# Altium PCB PCB_SHT30.PcbDoc
Units mm, origin at the board's own origin, x right, y up, seen from the top; angles counter-clockwise.
Board outline 12.19 x 17.09 mm, 2 copper layers (Top Layer, Bottom Layer); 8 components, 8 nets, 27 pads, 0 vias.
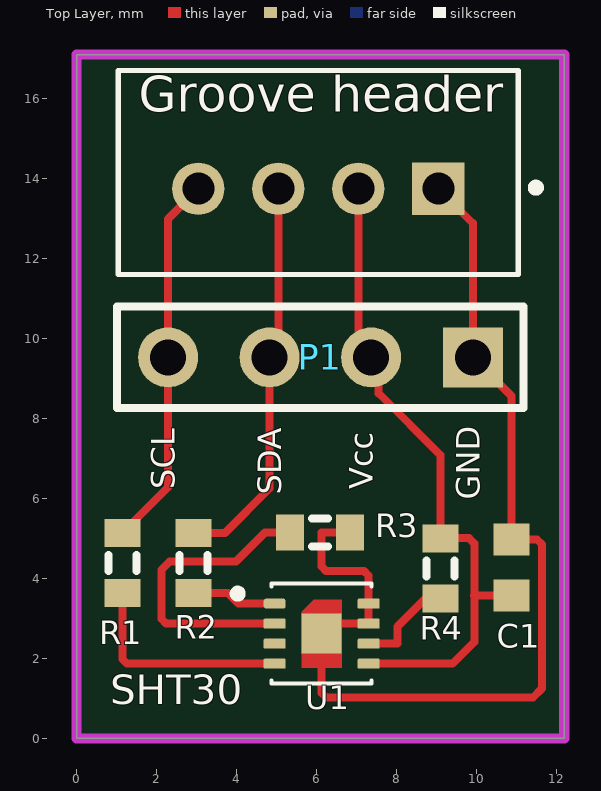
[diagram p0: Top Layer view]
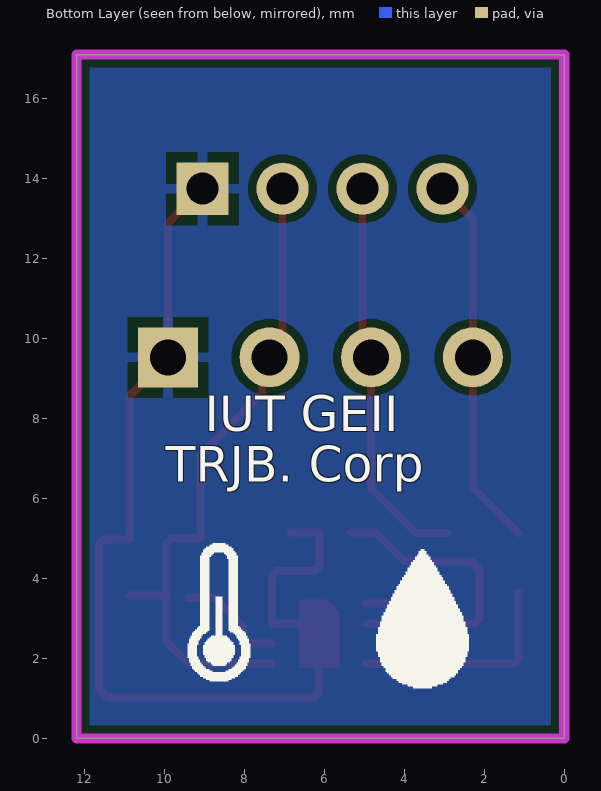
[diagram p1: Bottom Layer view, seen from below]

## Layer stack, top to bottom
Top Solder: solder mask 0.0102, Solder Resist, Dk 3.5
Top Layer: signal copper 0.0356
Dielectric 1: dielectric 0.32, FR-4, Dk 4.8
Bottom Layer: signal copper 0.0356
Bottom Solder: solder mask 0.0102, Solder Resist, Dk 3.5

## Board outline
0,0 0,17.094 12.192,17.094 12.192,0

## Design rules (kind name [scope] priority, off if disabled: settings)
Clearance [All] p1: gap=0.2 ignorepadtopadclearanceinfootprint=FALSE
PolygonConnect [All] p1: connectstyle=Relief reliefconductorwidth=0.254 reliefentries=4 polygonreliefangle="90 Angle" airgapwidth=0.254
RoutingVias [All] p1: holewidth=0.711 width=1.27 viastyle="Through Hole" minholewidth=0.711 minwidth=1.27 maxholewidth=0.711 maxwidth=1.27
SolderMaskExpansion [All] p1: expansion=0.102 istentingtop=FALSE
SupplyNets "Schematic Supply Nets_1" [InNet('GND')] p1: voltage=0.000
SupplyNets "Schematic Supply Nets" [InNet('VCC')] p2: voltage=0.000
Width [All] p1: maxlimit=0.254 minlimit=0.2 preferedwidth=0.2 minimp=50.000000 maximp=50.000000 favimp=50.000000
30 further rules are at their usual default settings.

## Components (designator, comment, footprint, x,y, rotation, side; value= is the part's Value field where it differs from the comment)
C1 "Cap Semi" 1608[0603] 10.871,4.267 r270 top value=100nF
"Groove header" "Groove Sensor Header" SEEED_110990030 6.042,13.741 r180 top (schematic designator P2)
P1 "Header 4" HDR1X4 9.906,9.525 r180 top
R1 "Res3" J1-0603 1.143,4.383 r90 top value=10k
R2 "Res3" J1-0603 2.921,4.383 r90 top value=10k
R3 "Res3" J1-0603 6.084,5.145 r0 top value=10k
R4 "Res3" J1-0603 9.093,4.242 r90 top value=10k
U1 "SHT30" XDCR_SHT30-DIS-B10KS 6.128,2.617 r0 top

## Footprints (in the part's own frame and the unit in brackets; to place one, negate y for a bottom-side part, rotate by r counter-clockwise, add the part's x,y. Pads: shape width x height; smd on the part's side, far side on the other; paste and mask are expansions set on the pad)
1608[0603] [mm] "Chip Capacitor, Body 1.6x0.8mm, IPC High Density"
  rect 0.8x0.9 smd: 1(-0.7,0) 2(0.7,0)
  body extent -0.87,-0.48 0.87,0.48, height 1.3
HDR1X4 [mm] "Connector; Header; 4 Position"
  rect 1.5x1.5 hole 0.9: 1(0,0)
  round 1.5 hole 0.9: 2(2.54,0) 3(5.08,0) 4(7.62,0)
  silkscreen extent -1.27,-1.27 8.89,1.27
J1-0603 [mm] "Chip Resistor, Body 1.6x0.8mm, IPC High Density"
  rect 0.7x0.9 smd: 1(-0.75,0) 2(0.75,0)
  silkscreen extent -0.2,-0.35 0.2,0.35, body extent -0.85,-0.48 0.85,0.48, height 0.9
SEEED_110990030 [mm]
  rect 1.308x1.308 hole 0.8: 1(-3,0)
  round 1.308 hole 0.8: 2(-1,0) 3(1,0) 4(3,0)
  silkscreen extent -5.54,-2.95 5,2.15
XDCR_SHT30-DIS-B10KS [mm]
  rrect50% 0.55x0.25 smd mask+0: 1(-1.175,0.75)
  rrect20% 0.55x0.25 smd mask+0: 2(-1.175,0.25) 3(-1.175,-0.25) 4(-1.175,-0.75) 5(1.175,-0.75) 6(1.175,-0.25) 7(1.175,0.25) 8(1.175,0.75)
  rect 1x1 smd paste-1 mask+0: 9(0,0)
  Top Layer region: 0.5,-0.85 -0.5,-0.85 -0.5,0.55 -0.2,0.85 0.5,0.85
  silkscreen extent -2.2,-1.25 1.25,1.25

## Part data
C1: "Capacitor (Semiconductor SIM Model)", LatestRevisionDate=29-May-2009, LatestRevisionNote="IPC-7351 Footprint Added.", PackageDescription="Chip Capacitor", PackageReference=C1206, Published=8-Jun-2000, Publisher="Altium Limited"
"Groove header": library part CMP-002-00072-1, "GROVE 2MM 4PIN VERT CONN 10PCS", Case/Package=None, Arrow_Electronics-Purchase-URL=https://snapeda.com/shop?store=Arrow+Electronics&id=583576, Availability=Good, Component Type=Standard, Design Item ID=110990030, MF="Seeed Technology", Mouser-Purchase-URL=https://snapeda.com/shop?store=Mouser&id=583576, MP=110990030, Pins=4, Price=None, SnapEDA_Link=https://www.snapeda.com/parts/110990030/Seeed%20Technology%20Co.,%20Ltd/view-part/583576/?ref=snap, Source=110990030.SchLib
P1: "Header, 4-Pin", LatestRevisionDate=17-Jul-2002, LatestRevisionNote="Re-released for DXP Platform.", Publisher="Altium Limited"
R1 R2 R3 R4: "Resistor", LatestRevisionDate=29-May-2009, LatestRevisionNote="IPC-7351 Footprint Added.", PackageDescription="Chip Resistor", PackageReference=J1-0603, Published=8-Jun-2000, Publisher="Altium Limited"
U1: library part SHT30-DIS-B10KS, "SENSOR HUMID/TEMP 5V I2C 2% SMD", Package=None, Availability=Unavailable, MP=SHT30-DIS-B10KS, Price=None

## Nets (pads, with @x,y where several pads share a name; then routed paths per layer and width w, separated by ;. In a path a pad name is that pad's centre, name@x,y a point inside that pad or via, vN(x,y) a via of type N, cw(c..) or ccw(c..) an arc to the next point about the centre after c; other vN are vias at no path point)
GND: "Groove header.1" C1.1 P1.1 R3.2 U1.7 U1.8 U1.9 | length 26.4
  Top Layer w0.2: 6.121,5.145 6.121,4.301 6.239,4.184 7.186,4.184 7.303,4.066 U1.7 6.378,2.867 U1.9 6.128,1.133 6.245,1.016 11.405,1.016 11.633,1.245 11.633,4.85 11.516,4.967 C1.1 10.871,8.56 P1.1 9.906,12.878 9.042,13.741 ; 6.133,5.145 R3.2
NetR1_1: R1.1 U1.4 | length 5.5
  Top Layer w0.2: R1.1 1.143,1.984 1.26,1.867 U1.4
NetR2_1: R2.1 U1.1 | length 2.1
  Top Layer w0.2: R2.1 3.785,3.633 4.051,3.367 U1.1
NetR3_1: R3.1 U1.2 | length 7.7
  Top Layer w0.2: U1.2@4.949,2.871 2.234,2.871 2.117,2.988 2.117,4.21 2.327,4.42 3.988,4.42 4.713,5.145 R3.1
NetR4_1: R4.1 U1.6 | length 4.1
  Top Layer w0.2: U1.6 8.026,2.367 8.026,2.794 R4.1@8.738,3.506 ; R4.1@8.738,3.506 R4.1@9.398,3.506 ; R4.1@8.738,3.506 R4.1@9.398,3.506 ; R4.1@8.738,3.506 R4.1@9.398,3.506
SCL: "Groove header.4" P1.4 R1.2 | length 9.4
  Top Layer w0.2: R1.2 2.286,6.276 P1.4 2.286,12.985 3.042,13.741
SDA: "Groove header.3" P1.3 R2.2 | length 9.9
  Top Layer w0.2: R2.2 3.708,5.133 4.826,6.251 P1.3 5.042,9.741 5.042,13.741
VCC: "Groove header.2" C1.2 P1.2 R4.2 U1.5 | length 16.8
  Top Layer w0.2: 7.042,13.741 7.042,10.2 7.366,9.877 P1.2 7.553,9.338 7.553,8.627 9.093,7.087 9.093,5.004 9.813,5.004 9.825,4.992 9.943,4.875 9.943,3.567 9.943,2.412 9.398,1.867 U1.5 ; 9.936,3.567 C1.2
pads on no net: U1.3

## Polygon pours and split planes (outlines as drawn)
GND on Bottom Layer "GND BOT" (solid, pour order 1): 0,0 0,17.094 12.192,17.094 12.192,0

## Keep-outs
Keep-Out Layer:
  the board outline again, w0.254

## Silkscreen, mask and mechanical layers (free items; w line width, h text height)
Top Overlay:
  text "SCL" at 2.656,6.223 h1 r90
  text "Vcc" at 7.61,6.224 h1 r90
  text "SDA" at 5.323,6.096 h1 r90
  text "GND" at 10.276,5.969 h1 r90
  text "SHT30" at 0.838,0.598 h1.27
Bottom Overlay:
  drawing of 3 lines, arcs and shapes, not listed
  text "IUT GEII" at 8.992,7.383 h1.52
  text "TRJB. Corp" at 9.957,6.113 h1.52